# Altium PCB AT32.PcbDoc (part 7 of 9)
Units mm, origin at the board's own origin, x right, y up, seen from the top; angles counter-clockwise.
Board outline 152.1 x 84.6 mm, 2 copper layers (Top Layer, Bottom Layer); 49 components, 58 nets, 223 pads, 0 vias.
Unrouted connection lines stored in the file: 3.
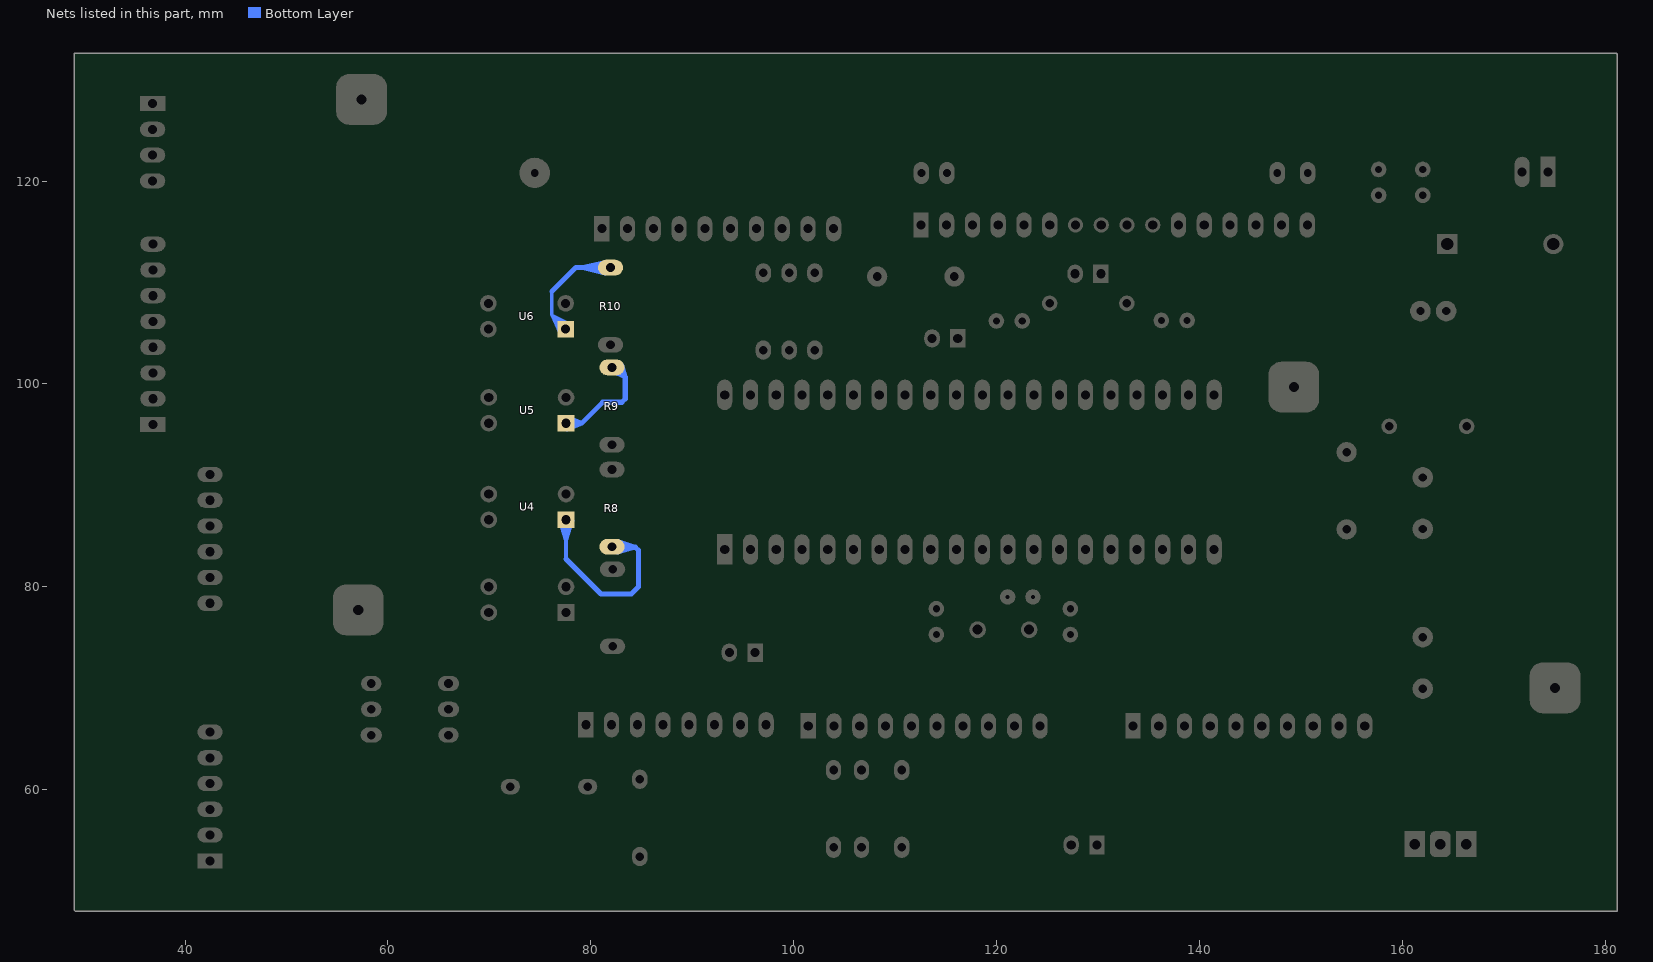
[diagram p7: the nets of this part, all layers, seen from the top]

## Nets (pads, with @x,y where several pads share a name; then routed paths per layer and width w, separated by ;. In a path a pad name is that pad's centre, name@x,y a point inside that pad or via, vN(x,y) a via of type N, cw(c..) or ccw(c..) an arc to the next point about the centre after c; other vN are vias at no path point) (continued)
NetR8_2: R8.2 U4.1 | length 107.5
  Bottom Layer w0.4: U4.1@77.124,86.17 cw(c76.065,85.111) 77.562,85.111 cw(c79.059,85.111) U4.1@78,86.17 ; 77.562,82.738 U4.1@77.562,86.608 ; R8.2@82.092,84.346 R8.2@82.538,83.9 ; U4.1@76.949,86.513 77.562,84.588 ; U4.1@76.949,86.513 77.562,84.588 ; U4.1@76.949,86.513 77.562,84.588 ; U4.1@76.949,86.513 77.562,84.588 ; U4.1@76.949,86.513 77.562,84.588 ; U4.1@76.949,86.513 77.562,84.588 ; U4.1@77.342,86.596 77.562,84.588 ; U4.1@77.342,86.596 77.562,84.588 ; U4.1@77.342,86.596 77.562,84.588 ; U4.1@77.342,86.596 77.562,84.588 ; U4.1@77.342,86.596 77.562,84.588 ; U4.1@77.342,86.596 77.562,84.588 ; 77.562,84.588 U4.1@78.175,86.513 ; 77.562,84.588 U4.1@77.782,86.596 ; 77.562,84.588 U4.1@78.175,86.513 ; 77.562,84.588 U4.1@77.782,86.596 ; 77.562,84.588 U4.1@78.175,86.513 ; 77.562,84.588 U4.1@77.782,86.596 ; 77.562,84.588 U4.1@77.562,86.608 ; 77.562,84.588 U4.1@78.175,86.513 ; 77.562,84.588 U4.1@77.782,86.596 ; 77.562,84.588 U4.1@77.562,86.608 ; 77.562,84.588 U4.1@78.175,86.513 ; 77.562,84.588 U4.1@77.782,86.596 ; 77.562,84.588 U4.1@77.562,86.608 ; 77.562,84.588 U4.1@78.175,86.513 ; 77.562,84.588 U4.1@77.782,86.596 ; 77.562,84.588 U4.1@77.562,86.608
  Bottom Layer w0.5: 77.562,82.738 81,79.3 84,79.3 84.692,79.992 84.692,83.608 84.4,83.9 ; R8.2@82.538,83.9 84.4,83.9 ; R8.2@82.94,83.578 cw(c83.716,82.802) 83.716,83.9 ; R8.2@82.94,84.314 ccw(c83.938,85.312) 83.938,83.9 ; R8.2@82.572,83.946 84.4,83.9 ; R8.2@82.572,83.946 84.4,83.9 ; R8.2@82.572,83.946 84.4,83.9 ; R8.2@82.572,83.946 84.4,83.9 ; R8.2@82.572,83.946 84.4,83.9 ; R8.2@82.633,83.43 84.4,83.9 ; R8.2@82.633,83.43 84.4,83.9 ; R8.2@82.633,83.43 84.4,83.9 ; R8.2@82.633,83.43 84.4,83.9 ; R8.2@82.633,83.43 84.4,83.9 ; R8.2@82.659,84.459 84.4,83.9 ; R8.2@82.659,84.459 84.4,83.9 ; R8.2@82.659,84.459 84.4,83.9 ; R8.2@82.659,84.459 84.4,83.9 ; R8.2@82.659,84.459 84.4,83.9
NetR9_2: R9.2 U5.1 | length 48.8
  Bottom Layer w0.33: R9.2@81.933,101.467 R9.2@82.633,101.467
  Bottom Layer w0.5: U5.1@77.965,95.73 cw(c78.938,94.757) 78.938,96.133 cw(c78.938,97.509) U5.1@77.965,96.536 ; R9.2@82.572,101.106 cw(c82.572,100.087) 83.292,100.808 ; R9.2@82.633,101.467 83.4,100.7 ; R9.2@83.086,101.55 ccw(c84.014,101.412) 83.351,100.749 ; U5.1@77.562,96.133 79.113,96.133 ; U5.1@77.562,96.133 79.113,96.133 ; U5.1@77.562,96.133 79.113,96.133 ; U5.1@77.667,95.573 79.113,96.133 ; U5.1@77.667,95.573 79.113,96.133 ; U5.1@77.667,95.573 79.113,96.133 ; U5.1@77.667,95.573 79.113,96.133 ; U5.1@77.667,96.693 79.113,96.133 ; U5.1@77.667,96.693 79.113,96.133 ; U5.1@77.667,96.693 79.113,96.133 ; U5.1@77.667,96.693 79.113,96.133 ; 79.113,96.133 81.18,98.2 83.06,98.2 83.36,98.5 83.4,98.5 83.4,100.7 ; R9.2@82.266,101.206 83.4,100.7 ; R9.2@82.266,101.206 83.4,100.7 ; R9.2@82.266,101.206 83.4,100.7 ; R9.2@82.266,101.206 83.4,100.7 ; R9.2@82.266,101.206 83.4,100.7 ; R9.2@82.572,101.626 83.4,100.7 ; R9.2@82.572,101.626 83.4,100.7 ; R9.2@82.572,101.626 83.4,100.7 ; R9.2@82.572,101.626 83.4,100.7 ; R9.2@82.572,101.626 83.4,100.7 ; R9.2@83.024,101.884 83.4,100.7 ; R9.2@83.024,101.884 83.4,100.7 ; R9.2@83.024,101.884 83.4,100.7 ; R9.2@83.024,101.884 83.4,100.7 ; R9.2@83.024,101.884 83.4,100.7
NetR10_2: R10.2 U6.1 | length 118.4
  Bottom Layer w0.33: 76.16,109.107 76.16,106.806 ; 76.376,106.59 cw(c75.189,105.404) U6.1@76.867,105.404 ; 76.472,106.494 ccw(c77.522,107.544) U6.1@77.522,106.059 ; U6.1@76.939,106.027 cw(c76.316,105.404) U6.1@77.197,105.404 ; U6.1@77.562,105.404 76.16,106.806 ; R10.2@81.23,111.5 R10.2@81.53,111.2 ; 76.16,106.806 U6.1@76.982,105.033 ; 76.16,106.806 U6.1@77.909,105.933 ; 76.16,106.806 U6.1@77.271,105.198 ; 76.16,106.806 U6.1@77.735,105.649 ; 76.16,106.806 U6.1@77.522,105.404 ; 76.16,106.806 U6.1@76.982,105.033 ; 76.16,106.806 U6.1@77.909,105.933 ; 76.16,106.806 U6.1@77.271,105.198 ; 76.16,106.806 U6.1@77.735,105.649 ; 76.16,106.806 U6.1@77.522,105.404 ; 76.16,106.806 U6.1@76.982,105.033 ; 76.16,106.806 U6.1@77.909,105.933 ; 76.16,106.806 U6.1@77.271,105.198 ; 76.16,106.806 U6.1@77.735,105.649 ; 76.16,106.806 U6.1@77.522,105.404 ; 76.16,106.806 U6.1@76.982,105.033 ; 76.16,106.806 U6.1@77.909,105.933 ; 76.16,106.806 U6.1@77.271,105.198 ; 76.16,106.806 U6.1@77.735,105.649 ; 76.16,106.806 U6.1@77.522,105.404 ; 76.16,106.806 U6.1@76.982,105.033 ; 76.16,106.806 U6.1@77.909,105.933 ; 76.16,106.806 U6.1@77.271,105.198 ; 76.16,106.806 U6.1@77.735,105.649 ; 76.16,106.806 U6.1@77.522,105.404 ; 76.16,106.806 U6.1@76.982,105.033 ; 76.16,106.806 U6.1@77.909,105.933 ; 76.16,106.806 U6.1@77.271,105.198 ; 76.16,106.806 U6.1@77.735,105.649 ; 76.16,106.806 U6.1@77.522,105.404 ; 76.16,106.806 U6.1@76.982,105.033 ; 76.16,106.806 U6.1@77.909,105.933 ; 76.16,106.806 U6.1@77.271,105.198 ; 76.16,106.806 U6.1@77.735,105.649 ; 76.16,106.806 U6.1@77.522,105.404
  Bottom Layer w0.5: 76.16,109.107 78.553,111.5 R10.2@81.23,111.5 ; 80.164,111.5 cw(c80.164,110.169) R10.2@81.104,111.11 ; 80.27,111.5 ccw(c80.27,112.68) R10.2@81.104,111.846 ; 79.202,111.5 R10.2@81.407,110.962 ; 79.202,111.5 R10.2@81.418,111.995 ; 79.202,111.5 R10.2@81.472,111.478 ; 79.202,111.5 R10.2@81.407,110.962 ; 79.202,111.5 R10.2@81.418,111.995 ; 79.202,111.5 R10.2@81.472,111.478 ; 79.202,111.5 R10.2@81.407,110.962 ; 79.202,111.5 R10.2@81.418,111.995 ; 79.202,111.5 R10.2@81.472,111.478 ; 79.202,111.5 R10.2@81.407,110.962 ; 79.202,111.5 R10.2@81.418,111.995 ; 79.202,111.5 R10.2@81.472,111.478 ; 79.202,111.5 R10.2@81.407,110.962 ; 79.202,111.5 R10.2@81.418,111.995 ; 79.202,111.5 R10.2@81.472,111.478